# EAGLE board Moteino (EAGLE 6.3)
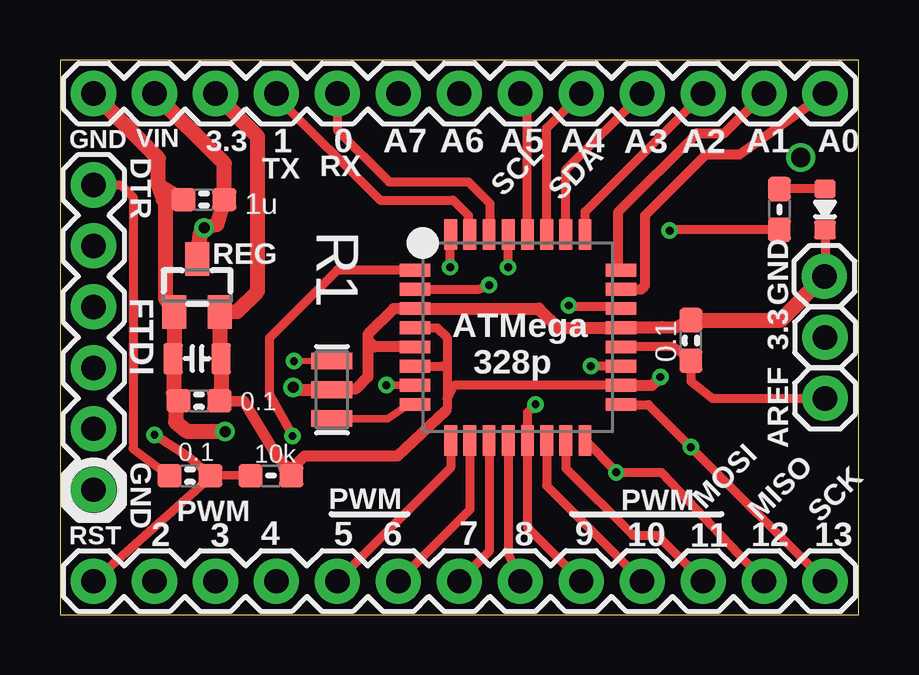
[diagram p0: board, top side]
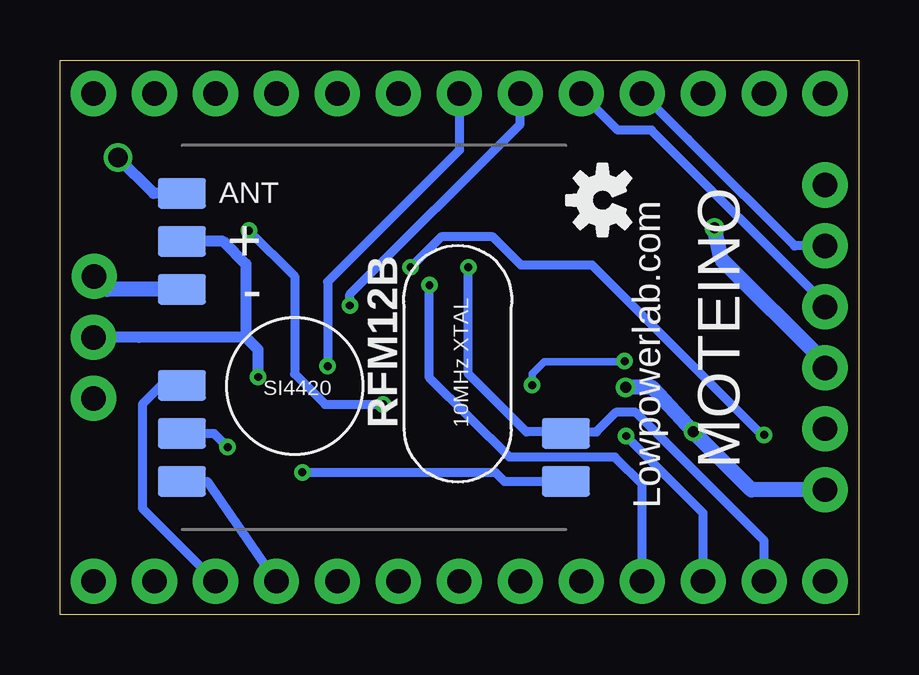
[diagram p1: board, bottom side, seen from below]

Size 33.27 x 23.11 mm. Coordinates in mm from the lower left corner, seen from the top.
Outline: 0,0 33.27,0 33.27,23.11 0,23.11 0,0
Copper layers (1*16): Top 0.0356mm / dielectric 1.5011mm / Bottom 0.0356mm
Design rules "default": minimum track width 6mil, minimum drill 13mil, track to track 6mil, track to pad 6mil, pad to pad 6mil, via to via 6mil, smd to smd 6mil, copper to edge 15mil, drill to drill 6mil, minimum pad ring 7mil, minimum via ring 7mil, stop-mask expansion 4mil, vias tented up to drill 18mil, thermal gap 10mil
Net classes: 1 power: width 0.381 mm, clearance 0.254 mm

## Footprints (pad centres in the part's own frame; a part is rotated, then mirrored left to right if it is on the bottom)
1X01 = drill 1.016 pad 1.88: 1 0,0
1X13 = drill 1.016 pad 1.88: 1 0,0; 2 2.54,0; 3 5.08,0; 4 7.62,0; 5 10.16,0; 6 12.7,0; 7 15.24,0; 8 17.78,0; 9 20.32,0; 10 22.86,0; 11 25.4,0; 12 27.94,0; 13 30.48,0
TQFP32-08 = smd 1.27 x 0.533: 1 -4.293,2.8; 2 -4.293,2; 3 -4.293,1.2; 4 -4.293,0.4; 5 -4.293,-0.4; 6 -4.293,-1.2; 7 -4.293,-2; 8 -4.293,-2.8; 17 4.293,-2.8; 18 4.293,-2; 19 4.293,-1.2; 20 4.293,-0.4; 21 4.293,0.4; 22 4.293,1.2; 23 4.293,2; 24 4.293,2.8 | smd 0.533 x 1.27: 9 -2.8,-4.293; 10 -2,-4.293; 11 -1.2,-4.293; 12 -0.4,-4.293; 13 0.4,-4.293; 14 1.2,-4.293; 15 2,-4.293; 16 2.8,-4.293; 25 2.8,4.293; 26 2,4.293; 27 1.2,4.293; 28 0.4,4.293; 29 -0.4,4.293; 30 -1.2,4.293; 31 -2,4.293; 32 -2.8,4.293
0603-CAP = smd 1.016 x 0.965: 1 -0.85,0; 2 0.85,0
0805-CAP = smd 0.8 x 1.3: 1 -1,0; 2 1,0
1X06 = drill 1.016 pad 1.88: 1 0,0; 2 2.54,0; 3 5.08,0; 4 7.62,0; 5 10.16,0; 6 12.7,0
SOT23 = smd 1 x 1.4: 1 -0.95,-1.1; 2 0.95,-1.1; 3 0,1.1
0603-RES = smd 1.016 x 0.965: 1 -0.85,0; 2 0.85,0
RFM12B-MINPADS = smd 2 x 1.27: ANT 8,-6; GND 8,-2; IRQ -8,4; SCK 8,4; SDI 8,2; SDO -8,6; SEL 8,6; VDD 8,-4
RFM12B-ANTENNA = drill 0.8: P$1 0,0
0603-LED = smd 0.8 x 0.9: MINUS -0.85,0; PLUS 0.85,0
RESONATOR-SMD = smd 0.7 x 1.7: 1 -1.2,0; 2 0,0; 3 1.2,0

## Placement (x,y rotation side)
+  M01PTH  [1X01]  31.88,11.56 270 top
ANALOGSIDE  M13  [1X13]  31.88,21.72 180 top
ATMEGA328  ATMega-328  [TQFP32-08]  19.08,11.56 0 top
C1  0.1  [0603-CAP]  5.41,5.79 180 top
C2  1u  [0603-CAP]  5.99,17.3 180 top
C3  10u  [0805-CAP]  5.71,10.67 180 top
C4  0.1  [0603-CAP]  5.79,8.92 180 top
C5  0.1  [0603-CAP]  26.29,11.43 90 top
DIGITALSIDE  M13  [1X13]  31.88,1.4 180 top
FTDI  FTDI  [1X06]  1.4,5.21 90 top
IC3  MCP1703CB  [SOT23]  5.71,13.72 0 top
JP1  M01PTH  [1X01]  31.88,9.02 0 top
JP2  M01PTH  [1X01]  31.85,14.1 0 top
R1  10k  [0603-RES]  8.79,5.79 180 top
R2  1k5  [0603-RES]  29.97,16.89 270 top
RFM12B  RFM12B_MINPADS  [RFM12B-MINPADS]  20.19,11.56 180 bottom
U$1  RFM12B_ANTENNA  [RFM12B-ANTENNA]  30.86,19.05 0 top
U$2  LED0603  [0603-LED]  31.88,16.89 90 top
U$3  [OSHW-LOGO-S]  10.67,17.27 90 bottom
X1  16 MHz  [RESONATOR-SMD]  11.33,9.37 270 top

## Library data of the parts
+ ANALOGSIDE DIGITALSIDE FTDI JP1 JP2 = SparkFun-Connectors
ATMEGA328 C1-C5 R1 R2 RFM12B U$1 U$2 = LowPowerLab
IC3 = linear
U$3 = SparkFun-Aesthetics
X1 = SparkFun

## Nets
A0: ANALOGSIDE.1 ATMEGA328.23
A1: ANALOGSIDE.2 ATMEGA328.24
A2: ANALOGSIDE.3 ATMEGA328.25
A3: ANALOGSIDE.4 ATMEGA328.26
A4_SDA: ANALOGSIDE.5 ATMEGA328.27
A5_SCL: ANALOGSIDE.6 ATMEGA328.28
A6: ANALOGSIDE.7 ATMEGA328.19
A7: ANALOGSIDE.8 ATMEGA328.22
AREF: ATMEGA328.20 C5.1 JP1.1
D0_RX: ANALOGSIDE.9 ATMEGA328.30 FTDI.4
D1_TX: ANALOGSIDE.10 ATMEGA328.31 FTDI.5
D2: ATMEGA328.32 DIGITALSIDE.12 RFM12B.IRQ
D3: ATMEGA328.1 DIGITALSIDE.11
D4: ATMEGA328.2 DIGITALSIDE.10
D5: ATMEGA328.9 DIGITALSIDE.9
D6: ATMEGA328.10 DIGITALSIDE.8
D7: ATMEGA328.11 DIGITALSIDE.7
D8: ATMEGA328.12 DIGITALSIDE.6
D9: ATMEGA328.13 DIGITALSIDE.5 R2.2
D10_SS: ATMEGA328.14 DIGITALSIDE.4 RFM12B.SEL
D11_MOSI: ATMEGA328.15 DIGITALSIDE.3 RFM12B.SDI
D12_MISO: ATMEGA328.16 DIGITALSIDE.2 RFM12B.SDO
D13_SCK: ATMEGA328.17 DIGITALSIDE.1 RFM12B.SCK
GND [power]: ANALOGSIDE.13 ATMEGA328.3 ATMEGA328.5 ATMEGA328.21 C2.2 C3.2 C4.2 C5.2 FTDI.1 IC3.1 JP2.1 RFM12B.GND U$2.MINUS X1.2
N$1: ATMEGA328.7 X1.1
N$2: R2.1 U$2.PLUS
N$3: RFM12B.ANT U$1.P$1
N$20: C1.2 FTDI.6
N$21: ATMEGA328.8 X1.3
PWR [power]: ANALOGSIDE.12 C2.1 FTDI.3 IC3.3
RST: ATMEGA328.29 C1.1 DIGITALSIDE.13 R1.2
VCC: +.1 ANALOGSIDE.11 ATMEGA328.4 ATMEGA328.6 ATMEGA328.18 C3.1 C4.1 IC3.2 R1.1 RFM12B.VDD

## Tracks (layer width: path | path; a pad name or v marks a point on that pad's centre or on a via)
A0
  Top 0.406: ATMEGA328.23 24.22,13.56 24.38,13.72 24.38,16.64 26.92,19.18 28.32,19.18 ANALOGSIDE.1
A1
  Top 0.406: 23.11,14.36 ATMEGA328.24 23.24,14.48 23.24,16.76 26.54,20.07 27.69,20.07 ANALOGSIDE.2
A2
  Top 0.381: ATMEGA328.25 21.88,16.79 ANALOGSIDE.3
A3
  Top 0.381: ATMEGA328.26 21.07,18.54 ANALOGSIDE.4
A4_SDA
  Top 0.381: ATMEGA328.27 20.27,20.27 ANALOGSIDE.5
A5_SCL
  Top 0.381: ATMEGA328.28 19.47,21.42 ANALOGSIDE.6
A6  (via drill 0.33 pad 0.69)
  Top 0.381: ATMEGA328.19 v22.12,10.36
  Bottom 0.381: v22.12,10.36 22.12,13.87 16.64,19.36 ANALOGSIDE.7
A7  (via drill 0.33 pad 0.69)
  Top 0.381: ATMEGA328.22 23.3,12.83 21.26,12.83 v21.2,12.88
  Bottom 0.254: 21.2,12.96 v21.2,12.88
  Bottom 0.381: 21.2,12.96 21.2,13.35 14.1,20.45 ANALOGSIDE.8
AREF
  Top 0.381: ATMEGA328.20 25.57,11.16 C5.1 26.29,9.73 27.18,9.02 JP1.1
D0_RX
  Top 0.381: ANALOGSIDE.9 11.56,20.19 13.72,18.03 17.02,18.03 17.91,17.14 17.91,15.88 ATMEGA328.30
  Bottom 0.381: FTDI.4 1.4,12.95 8.64,20.19 10.03,20.19 ANALOGSIDE.9
D1_TX
  Top 0.381: ANALOGSIDE.10 9.02,21.59 13.34,17.27 16.38,17.27 17.02,16.64 17.02,15.91 ATMEGA328.31
  Bottom 0.381: FTDI.5 2.67,15.37 6.86,19.56 7.11,19.81 ANALOGSIDE.10
D2  (via drill 0.33)
  Top 0.381: v16.26,14.48 16.26,15.83 ATMEGA328.32
  Bottom 0.381: DIGITALSIDE.12 3.94,3.07 9.29,8.43 10.12,8.43 10.92,7.62 11.56,7.62 | v16.26,14.48 16.26,10.03 14,7.77 13.84,7.62 11.77,7.62 11.56,7.62 | RFM12B.IRQ 11.62,7.56 11.56,7.62
D3  (via drill 0.33 pad 0.69)
  Top 0.381: ATMEGA328.1 11.55,14.36 8.72,11.53 8.72,9.18 v9.69,7.45
  Bottom 0.381: DIGITALSIDE.11 6.48,4.24 v9.69,7.45
D4  (via drill 0.33 pad 0.69)
  Top 0.381: ATMEGA328.2 17.47,13.56 v17.88,13.74
  Bottom 0.381: v17.88,13.74 17.88,9.88 14.54,6.57 10.15,6.57 9.02,5.43 DIGITALSIDE.10
D5
  Top 0.381: ATMEGA328.9 16.27,6.12 DIGITALSIDE.9
D6
  Top 0.381: ATMEGA328.10 17.07,4.38 DIGITALSIDE.8
D7
  Top 0.381: ATMEGA328.11 17.88,2.63 DIGITALSIDE.7
D8
  Top 0.381: ATMEGA328.12 18.67,2.55 DIGITALSIDE.6
D9  (via drill 0.33)
  Top 0.381: DIGITALSIDE.5 19.47,3.64 ATMEGA328.13 19.47,8.43 v19.81,8.76 | R2.2 25.44,16.04 v25.4,16
  Bottom 0.381: v25.4,16 23.49,14.1 23.49,10.03 22.22,8.76 v19.81,8.76
D10_SS
  Top 0.381: ATMEGA328.14 20.27,5.38 DIGITALSIDE.4
  Bottom 0.381: DIGITALSIDE.4 27.15,5.56 RFM12B.SEL
D11_MOSI
  Top 0.381: ATMEGA328.15 21.07,6.1 23.88,3.3 24.89,3.3 DIGITALSIDE.3
  Bottom 0.381: DIGITALSIDE.3 29.84,4.44 29.84,8.76 29.05,9.56 RFM12B.SDI
D12_MISO  (via drill 0.33 pad 0.69)
  Top 0.381: DIGITALSIDE.2 25.06,5.93 v23.18,5.93 23.18,5.96 ATMEGA328.16
  Bottom 0.381: v23.18,5.93 15.13,5.93 14.76,5.56 RFM12B.SDO
D13_SCK  (via drill 0.33)
  Top 0.381: ATMEGA328.17 24.52,8.76 26.16,7.11 | 26.16,7.11 v26.29,6.98 | v26.29,6.98 DIGITALSIDE.1 | v26.29,6.98 26.16,7.11
  Bottom 0.381: RFM12B.SCK 26.86,7.56 v26.29,6.98
GND  (via drill 0.46 pad 0.81)
  Top 0.381: 4.77,12.04 IC3.1 | C4.2 4.82,9.07 | 11.35,9.4 X1.2 | U$2.MINUS 31.88,14.12 JP2.1
  Top 0.406: ATMEGA328.21 23.56,11.96 ATMEGA328.21 | ATMEGA328.21 23.3,11.96
  Top 0.457: ATMEGA328.3 13.9,12.76 12.83,11.68 12.83,11.43 | 12.83,11.43 12.83,9.91 12.32,9.4 11.35,9.4 | ATMEGA328.5 13.1,11.16 12.83,11.43
  Top 0.508: ATMEGA328.3 19.96,12.76 20.76,11.96 23.3,11.96 | v9.71,9.47 9.91,9.37 X1.2 | IC3.1 4.62,12.98 | 4.77,11.29 4.74,10.66 | 25.09,11.99 25.63,11.96 | 25.63,11.96 25.27,11.96 ATMEGA328.21 | C5.2 25.63,11.96 | 5.06,17.32 C2.2
  Top 0.635: 4.77,12.04 4.77,11.29 | v6.88,7.62 5.31,7.62 4.82,8.02 4.82,9.07 | 4.09,17.89 4.29,17.3 5.03,17.27 4.39,17.04 4.39,13.18 IC3.1 | 4.09,17.89 5.06,17.32 | C4.2 4.74,9.25 4.74,10.66 C3.2 | C5.2 30.04,12.28 JP2.1 | 4.09,17.89 4.09,19.02 ANALOGSIDE.13
  Bottom 0.635: v9.71,9.47 8.61,9.47 v6.88,7.62 4.46,5.21 FTDI.1 | 31.31,13.56 JP2.1 31.31,13.56 | RFM12B.GND 31.31,13.56
N$1  (via drill 0.33 pad 0.69)
  Top 0.254: 10.73,10.57 v9.75,10.57 | ATMEGA328.7 14.76,9.56
  Top 0.305: X1.1 10.83,10.57 10.73,10.57 | v13.6,9.57 14.61,9.55 14.76,9.56
  Bottom 0.305: v13.6,9.57 13.6,10.05 13.11,10.55 9.88,10.55 v9.75,10.57
N$2
  Top 0.381: U$2.PLUS R2.1
N$3
  Bottom 0.457: RFM12B.ANT 29.37,17.56 U$1.P$1
N$20
  Top 0.381: FTDI.6 2.54,17.91 3.05,17.4 3.05,6.92 C1.2
N$21
  Top 0.305: X1.3 13.65,8.17 14.52,8.76 ATMEGA328.8
PWR  (via drill 0.46 pad 0.81)
  Top 0.381: 6.11,16.12 v6,16.12
  Top 0.635: 6.11,16.12 6.54,16.25 C2.1 6.84,18.81 6.78,18.87 ANALOGSIDE.12 | v6,16.12 5.84,15.83 IC3.3
  Bottom 0.635: FTDI.3 1.4,10.5 IC3.3 5.97,15.96 v6,16.12
RST  (via drill 0.33 pad 0.69)
  Top 0.254: 6.55,6.04 6.46,5.8
  Top 0.381: 18.67,15.82 ATMEGA328.29 v18.67,14.48 | R1.2 6.46,5.8 | C1.1 6.55,6.04 | C1.1 6.01,5.5 DIGITALSIDE.13 | C1.1 5.38,6.55 v3.94,7.49
  Bottom 0.381: v3.94,7.49 4.11,7.58 11.1,14.57 13.31,14.57 13.42,14.57 14.06,14.57 15.24,15.75 17.4,15.75 v18.67,14.48 | DIGITALSIDE.13
VCC  (via drill 0.33)
  Top 0.381: C4.1 6.6,9.5 | ATMEGA328.4 15.73,11.96 16.13,11.56 16.13,10.29 | 16.13,10.29 16.13,9.02 | 16.13,9.02 16.13,8.58 16.08,8.5 | ATMEGA328.6 15.93,10.36 16.13,10.29 | ATMEGA328.18 16.41,9.56 16.13,9.02
  Top 0.457: 16.08,8.5 14.06,6.61 10.19,6.61 9.62,6.03 R1.1 | 9.4,6.13 8.89,6.86 7.65,8.9 C4.1 | ATMEGA328.18 24.67,9.56 v25.02,9.91
  Top 0.508: 6.67,10.85 6.67,11.05
  Top 0.635: 6.67,11.05 IC3.2 7.39,12.64 8.23,13.48 8.23,19.93 ANALOGSIDE.11 | R1.1 9.4,6.13 | C4.1 6.71,9.37 C3.1 6.71,10.8 6.67,10.85
  Bottom 0.457: v25.02,9.91 25.02,11.05 25.53,11.56 | 25.53,11.56 29.97,11.56 +.1 | 25.53,11.56 25.53,14.61 26.48,15.56 RFM12B.VDD

## Text on the board
bPlace: RFM12B | MOTEINO | Lowpowerlab.com
_tsilk: VIN | 3.3 | 1 | 0 | A7 | A6 | A5 | A4 | A3 | A2 | A1 | A0 | GND | DTR | TX | RX | SCL | SDA | R1 | GND | REG | 3.3 | ATMega | FTDI | 328p | AREF | GND | PWM | PWM | 2 | 3 | 4 | 5 | 6 | 7 | 8 | 9 | PWM | 10 | MOSI | 11 | MISO | 12 | SCK | 13 | RST
_bsilk: VIN | 3.3 | 1 | 0 | A7 | A6 | A5 | A4 | A3 | A2 | A1 | A0 | GND | ANT | DTR | GND | OUT | IN | 3.3 | + | AREF | PWM | GND | 2 | 3 | 4 | 5 | 6 | 7 | 8 | 9 | 10 | 11 | 12 | 13 | RST